# Altium PCB PCB1.PcbDoc (part 1 of 3)
Units mil, origin at the board's own origin, x right, y up, seen from the top; angles counter-clockwise.
Board outline 3937.01 x 3937.01 mil, 4 copper layers (L1, L2, L3, L4), stack 61.831 mil thick; 104 components, 183 nets, 709 pads, 345 vias.
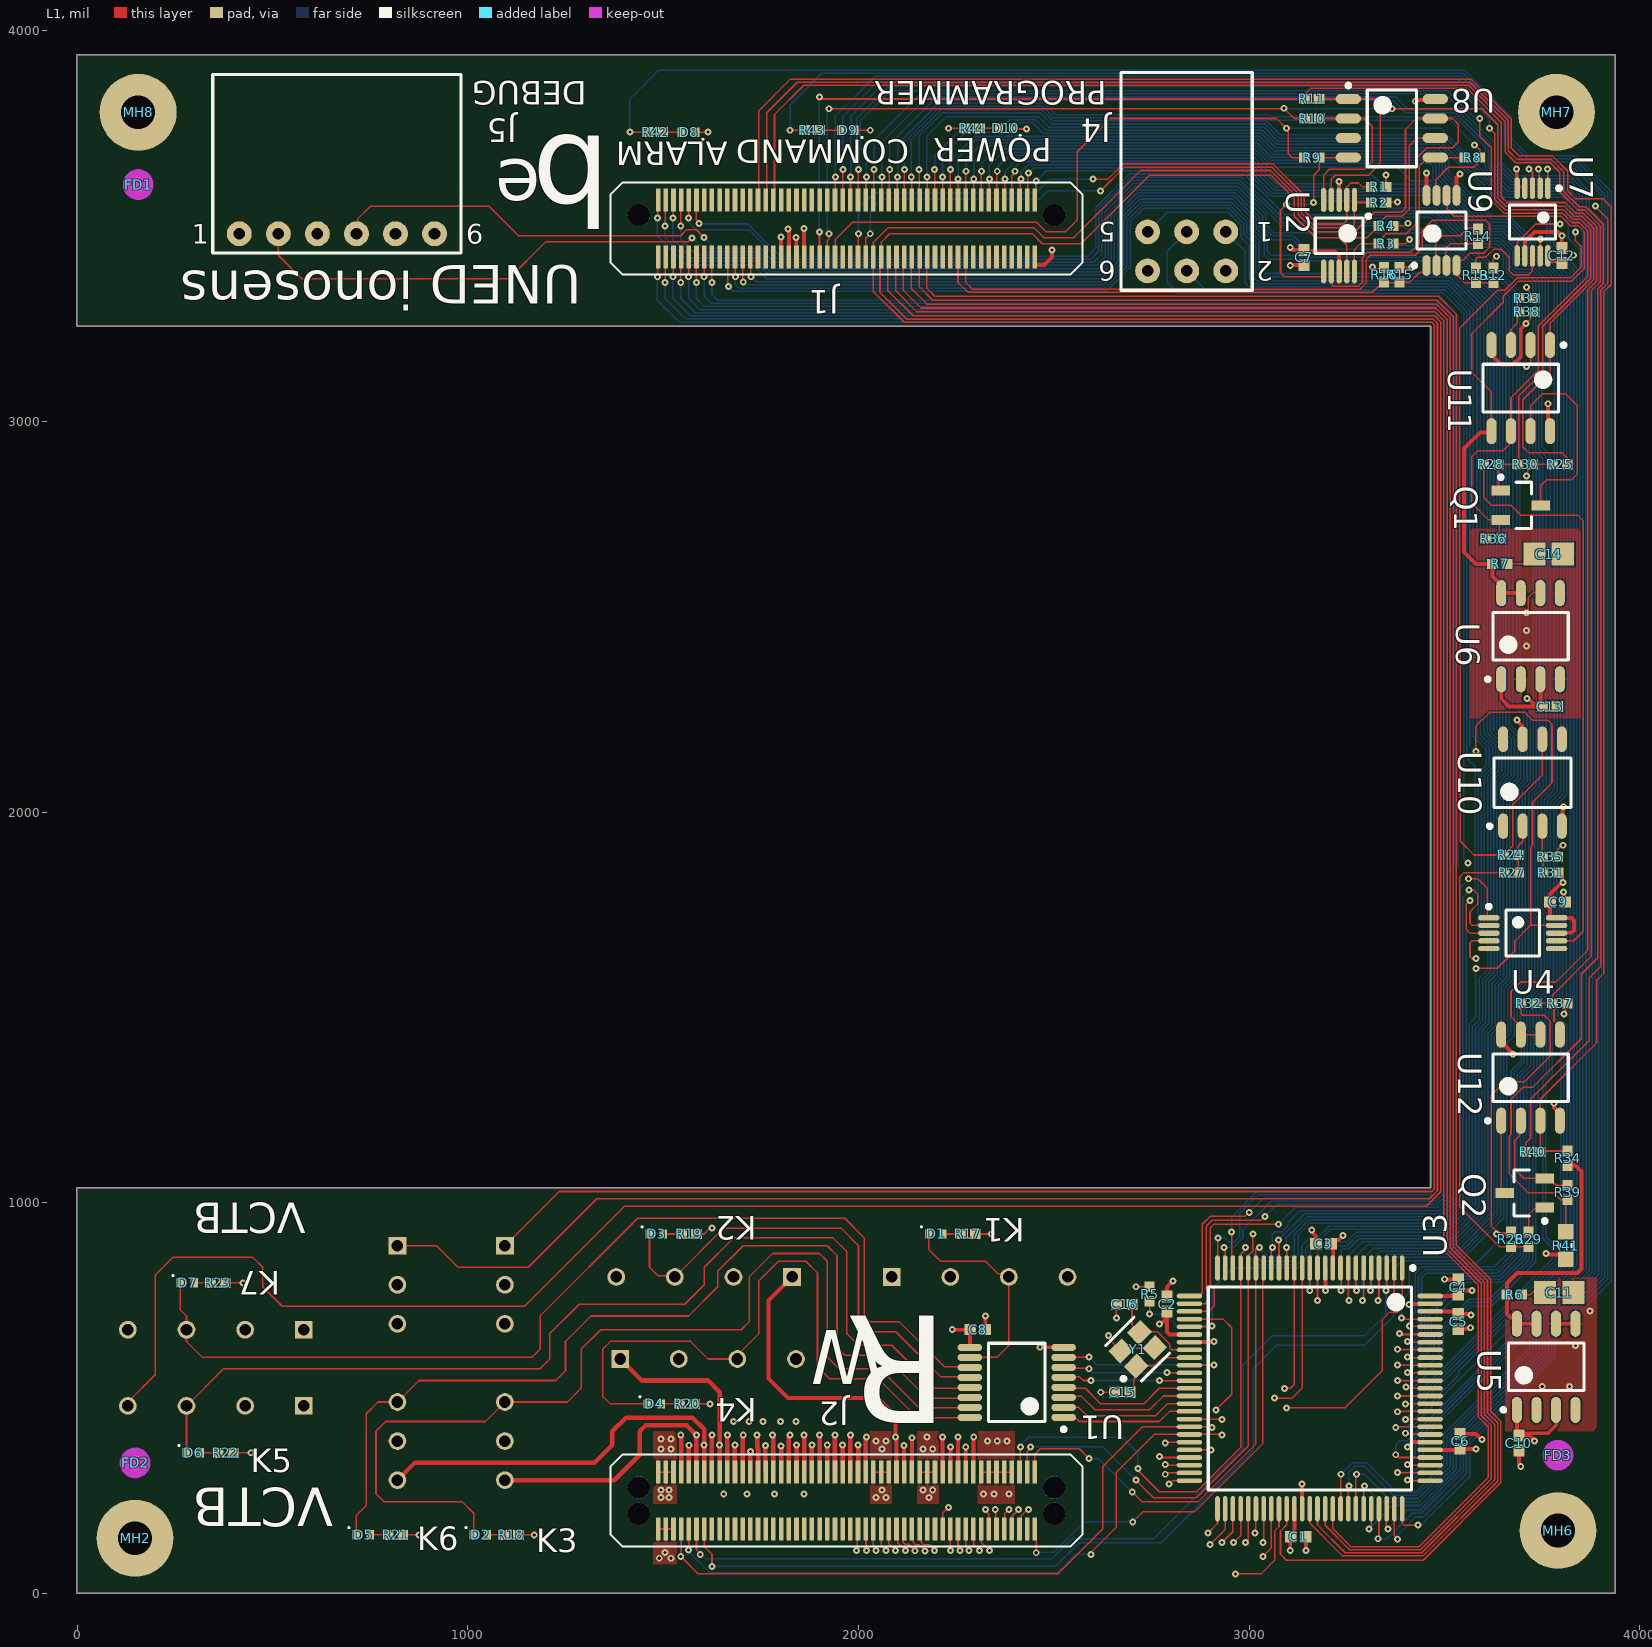
[diagram p0: L1 view]
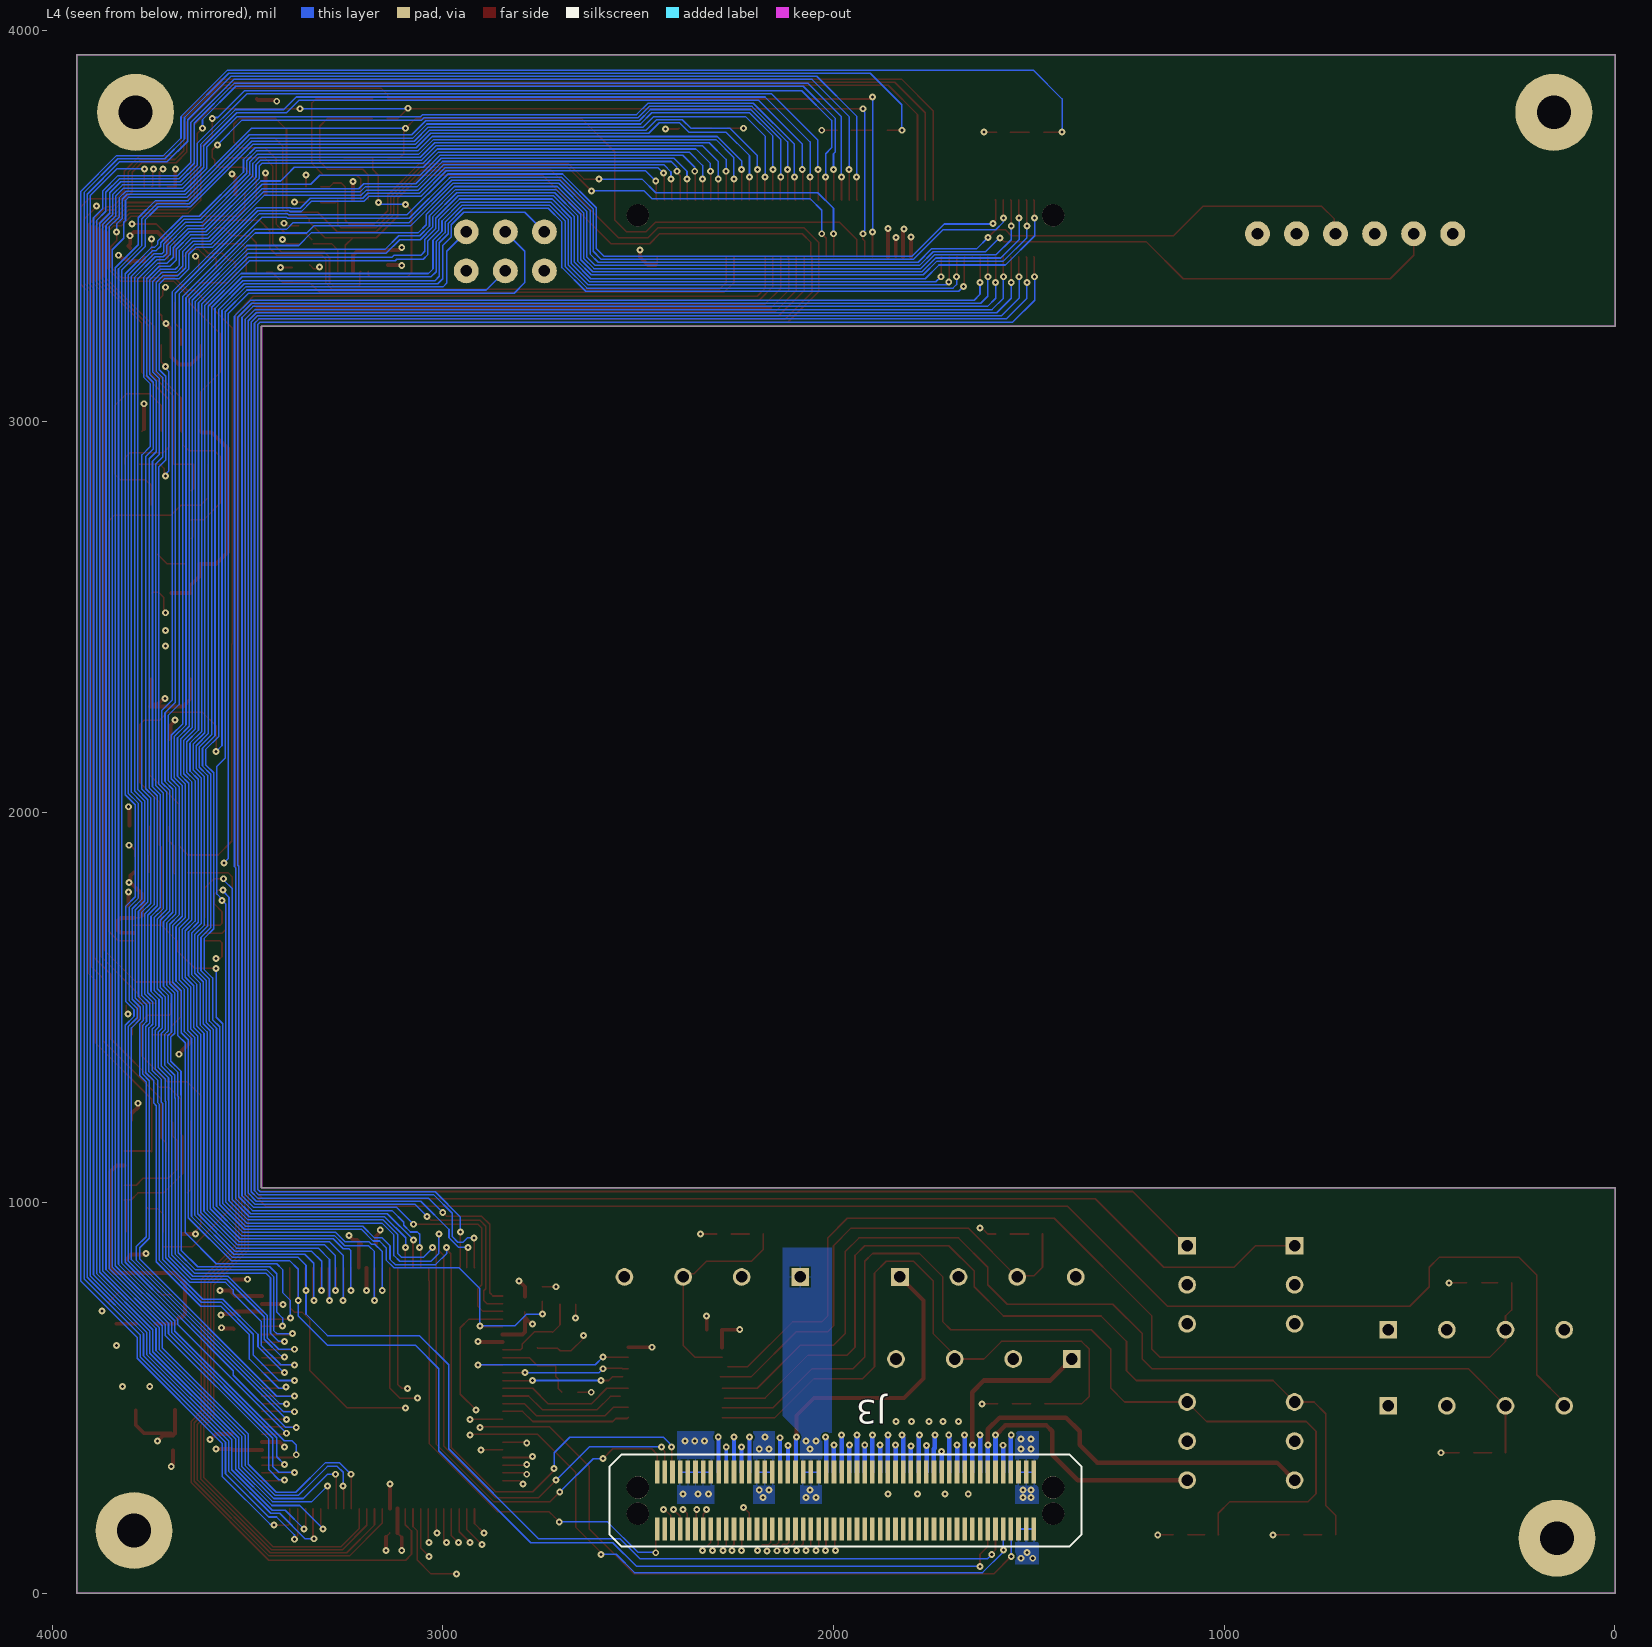
[diagram p1: L4 view, seen from below]
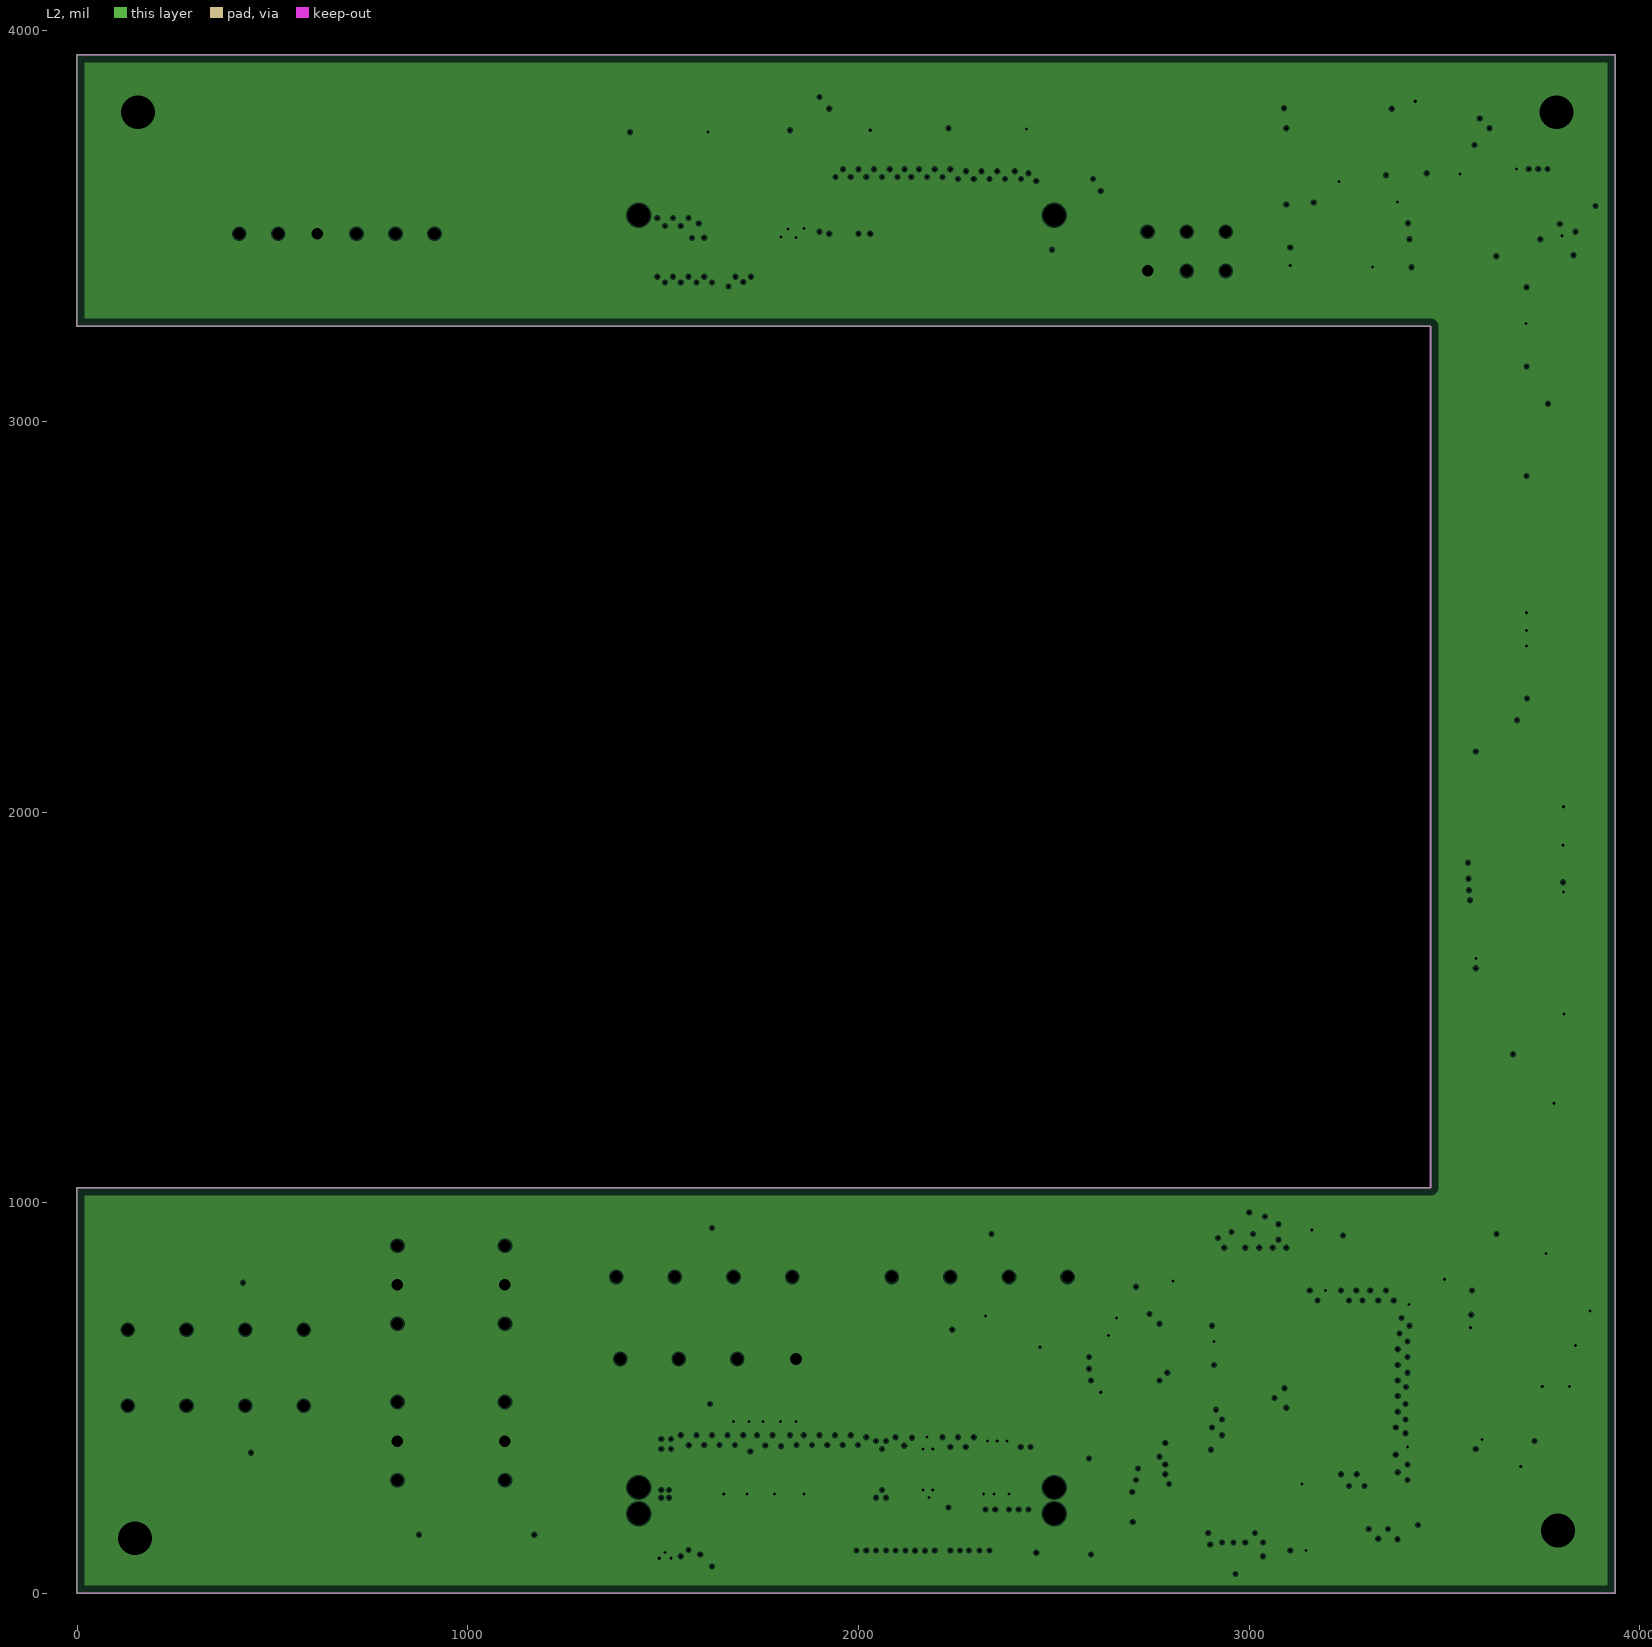
[diagram p2: L2, clearances drawn from the general rule]
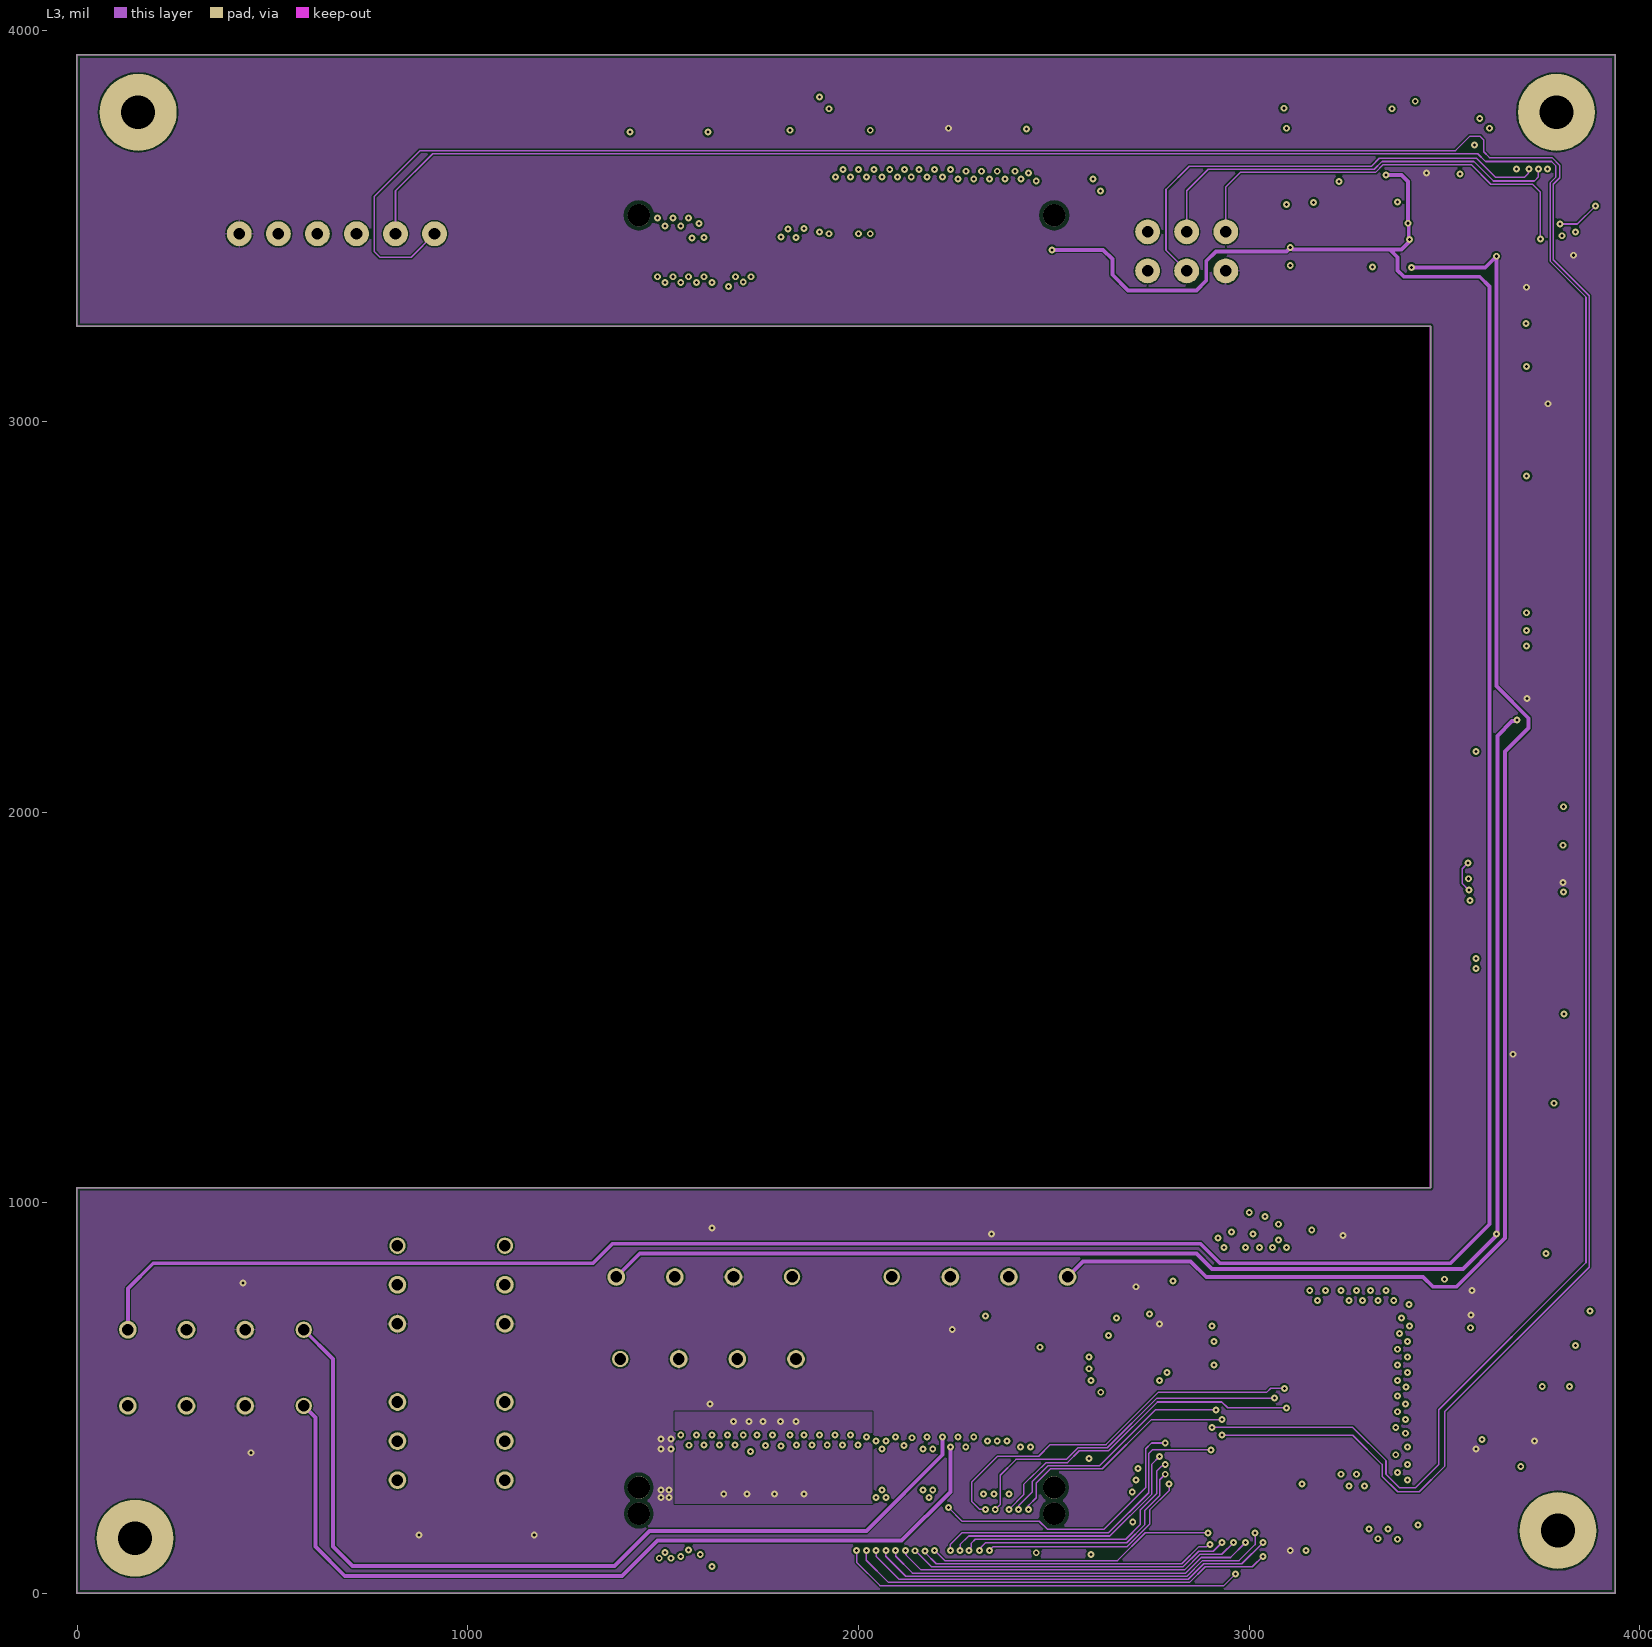
[diagram p3: L3]
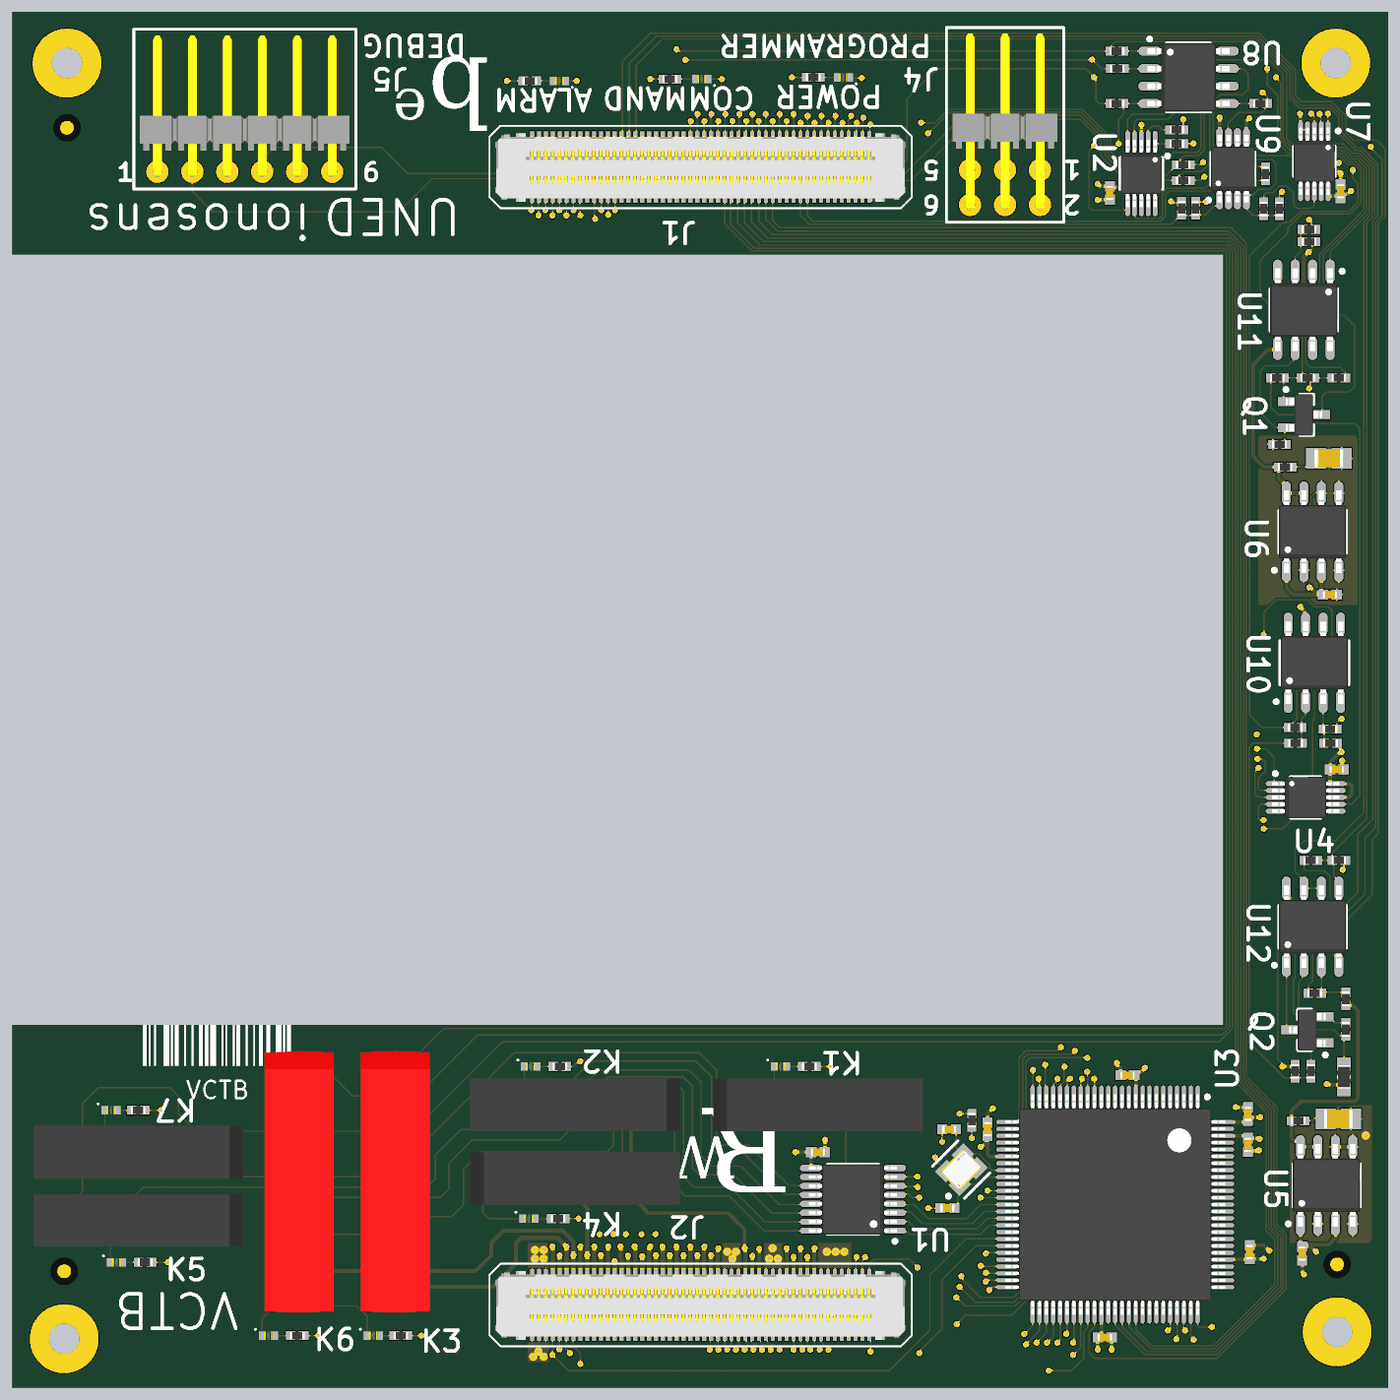
[diagram p6: 3D render of the assembled board from above, using the file's embedded part models]

## Layer stack, top to bottom
Top Mask: solder mask 0.5906, Solder Resist, Dk 3.8
L1: signal copper 1.378
Dielectric 1: prepreg 7.874, 7628, Dk 4.6
L2: plane copper 0.7087, net GND
Core: core 41.9291, FR-4, Dk 4.5
L3: signal copper 0.689
Dielectric 2: prepreg 7.874, 7628, Dk 4.6
L4: signal copper 1.378
Bottom Mask: solder mask 0.5906, Solder Resist, Dk 3.8

## Board outline
-0.53,0.82 -0.53,1038.62 3464.03,1038.62 3464.03,3243.34 -0.53,3243.34 -0.53,3937.83 3936.48,3937.83 3936.48,0.82

## Design rules (kind name [scope] priority, off if disabled: settings)
BoardOutlineClearance [All] p1: gap=7.87 ignorepadtopadclearanceinfootprint=FALSE
Clearance [All] p1: gap=4 ignorepadtopadclearanceinfootprint=FALSE except(5: Arc-Via Track-Via SMDPad-Via THPad-Via Via-Via Via-Fill Via-Poly Via-Region Via-Text; 9.84: Arc-Hole Track-Hole SMDPad-Hole THPad-Hole Via-Hole Fill-Hole Poly-Hole Region-Hole Text-Hole)
Clearance Clearance_keepout [OnLayer('Keep-Out Layer')] p2: gap=100 ignorepadtopadclearanceinfootprint=FALSE except(9.84: Arc-Hole Track-Hole SMDPad-Hole THPad-Hole Via-Hole Fill-Hole Poly-Hole Region-Hole Text-Hole; 25: Arc-THPad Track-THPad SMDPad-THPad THPad-THPad THPad-Via THPad-Fill THPad-Poly THPad-Region THPad-Text)
ComponentClearance [All] p1: gap=4 collisioncheckmode=3 verticalgap=4 showdistances=TRUE
DiffPairsRouting [All] p1: maxlimit=4 minlimit=4 mostfreqgap=4 toplayer_minwidth=4 toplayer_maxwidth=71497.94 toplayer_prefwidth=4 midlayer1_minwidth=4 midlayer1_maxwidth=71497.94 midlayer1_prefwidth=4 bottomlayer_minwidth=4 bottomlayer_maxwidth=71497.94 bottomlayer_prefwidth=4 maxuncoupledlength=500
Height [All] p1: minheight=0 maxheight=71497.94 prefheight=500
HoleSize [All] p1: absolutevalues=TRUE maxlimit=248.03 minlimit=7.87 maxpercent=80.000 minpercent=20.000
HoleToHoleClearance [All] p1: gap=9.84 allowstackedmicrovias=FALSE
MinimumAnnularRing [All] p1: minimumring=3
MinimumSolderMaskSliver [All] p1: minsoldermaskwidth=0
PlaneClearance [All] p1: clearance=4
PlaneConnect PlaneConnectPowerPads [InPadClass('PowerPads')] p1: planeconnectstyle=Direct reliefexpansion=20 reliefentries=4 reliefconductorwidth=10 reliefairgap=10
PlaneConnect [All] p2: pad.planeconnectstyle=Relief pad.reliefexpansion=11.81 pad.reliefentries=4 pad.reliefconductorwidth=4 pad.reliefairgap=4 via.planeconnectstyle=Direct via.reliefexpansion=11.81 via.reliefentries=4 via.reliefconductorwidth=5 via.reliefairgap=5
PolygonConnect PolygonConnectPowerPads [All vs (InPadClass('PowerPads'))] p1: connectstyle=Direct reliefconductorwidth=10 reliefentries=4 polygonreliefangle="90 Angle" airgapwidth=10
PolygonConnect [All] p2: thpad.connectstyle=Relief thpad.reliefconductorwidth=4 thpad.reliefentries=4 thpad.polygonreliefangle="90 Angle" thpad.airgapwidth=4 smdpad.connectstyle=Relief smdpad.reliefconductorwidth=4 smdpad.reliefentries=4 smdpad.polygonreliefangle="90 Angle" smdpad.airgapwidth=4 via.connectstyle=Direct via.reliefconductorwidth=5 via.reliefentries=4 via.polygonreliefangle="90 Angle" via.airgapwidth=5
RoutingVias [All] p1: holewidth=7.87 width=17.72 viastyle="Through Hole" minholewidth=7.87 minwidth=17.72 maxholewidth=248.03 maxwidth=257.87
SilkToSilkClearance [All] p1: silktosilkclearance=0
SilkToSolderMaskClearance [IsPad] p1: minsilkscreentomaskgap=4 clearancetoexposedcopper=TRUE
SolderMaskExpansion [All] p1: expansion=2.95 istentingtop=FALSE
Width Width_50ohm [InNetClass('Nodes')] p1: maxlimit=11.55 minlimit=10 preferedwidth=11.55 toplayer_minwidth=11.55 bottomlayer_minwidth=11.55 impedanceprofiledriven=TRUE impedanceprofileid={67C10FAE-C757-4667-B645-72E10606D8EE} impedanceprofilevalue=50.000000 minimp=50.000000 maximp=50.000000 favimp=50.000000
Width [All] p2: maxlimit=71497.94 minlimit=4 preferedwidth=4
20 further rules are at their usual default settings.

## Classes and differential pairs
net class Nodes: A B C D E F G H I J K L M N O P Q R S T U W X Y Z
component class Sheet3: FD1 FD2 FD3 J1 J2 J3 J4 J5 MH2 MH6 MH7 MH8
component class Sheet2: D1 D2 D3 D4 D5 D6 D7 K1 K2 K3 K4 K5 K6 K7 Q1 Q2 R12 R13 R14 R15 R16 R17 R18 R19 R20 R21 R22 R23 R24 R25 R26 R27 R28 R29 R30 R31 R32 R33 R34 R35 R36 R37 R38 R39 R40 R41 U9 U10 U11 U12
component class Sheet1: C1 C2 C3 C4 C5 C6 C7 C8 C9 C10 C11 C12 C13 C14 C15 C16 D8 D9 D10 R1 R2 R3 R4 R5 R6 R7 R8 R9 R10 R11 R42 R43 R44 U1 U2 U3 U4 U5 U6 U7 U8 Y1

## Components (designator, comment, footprint, x,y, rotation, side; value= is the part's Value field where it differs from the comment)
C1 "CC0402JRX7R7BB104" CAPC1005X06M#1 3125.71,145 r180 top value=100nF
C2 "CC0402JRX7R7BB104" CAPC1005X06M#1 2790,740.71 r270 top value=100nF
C3 "CC0402JRX7R7BB104" CAPC1005X06M#1 3190,895 r0 top value=100nF
C4 "CC0402JRX7R7BB104" CAPC1005X06M#1 3535,784.29 r270 top value=100nF
C5 "CC0402JRX7R7BB104" CAPC1005X06M#1 3535,695.71 r90 top value=100nF
C6 "CC0402JRX7R7BB104" CAPC1005X06M#1 3540,389.29 r270 top value=100nF
C7 "CC0402JRX7R7BB104" CAPC1005X06M#1 3140,3419.29 r90 top value=100nF
C8 "CC0402JRX7R7BB104" CAPC1005X06M#1 2305,675 r180 top value=100nF
C9 "CC0402JRX7R7BB104" CAPC1005X06M#1 3789.29,1770 r180 top value=100nF
C10 "CC0402JRX7R7BB104" CAPC1005X06M#1 3690,385 r90 top value=100nF
C11 "AC0805KKX7R8BB225" CAPC2012X14M 3793.58,770 r180 top value=2.2µF
C12 "CC0402JRX7R7BB104" CAPC1005X06M#1 3800,3424.29 r270 top value=100nF
C13 "CC0402JRX7R7BB104" CAPC1005X06M#1 3769.29,2270 r180 top value=100nF
C14 "AC0805KKX7R8BB225" CAPC2012X14M 3766.42,2660 r180 top value=2.2µF
C15 "CC0402JRNPO9BN200" CAPC1005X06M#2 2674.92,515 r0 top value=20pF
C16 "CC0402JRNPO9BN200" CAPC1005X06M#2 2679.92,740 r0 top value=20pF
D1 "SML-P13PTT86R" DIOC1005X02R 2197.62,920 r0 top
D2 "SML-P13PTT86R" DIOC1005X02R 1032.18,150 r0 top
D3 "SML-P13PTT86R" DIOC1005X02R 1482.62,920 r0 top
D4 "SML-P13PTT86R" DIOC1005X02R 1477.18,485 r0 top
D5 "SML-P13PTT86R" DIOC1005X02R 732.18,150 r0 top
D6 "SML-P13PTT86R" DIOC1005X02R 297.18,360 r0 top
D7 "SML-P13PTT86R" DIOC1005X02R 282.18,795 r0 top
D8 "SML-P12UTT86R" DIOC1005X02R 1565,3740 r180 top
D9 "SML-P12UTT86R" DIOC1005X02R 1972.38,3745 r180 top
D10 "SML-P12UTT86R" DIOC1005X02R 2377.38,3750 r180 top
FD1 "FID1X2R" FID1X2R 156.26,3605.79 r0 top
FD2 "FID1X2R" FID1X2R 148.39,334.13 r90 top
FD3 "FID1X2R" FID1X2R 3790.12,353.74 r90 top
J1 "LSHM-150-06.0-L-DV-A-N-K-TR" LSHM_150_06_0_L_DV_A_N_K_TR 1969.25,3493.58 r180 top
J2 "LSHM-150-06.0-L-DV-A-N-K-TR" LSHM_150_06_0_L_DV_A_N_K_TR 1969.25,237.68 r180 top
J3 "LSHM-150-06.0-L-DV-A-N-K-TR" LSHM_150_06_0_L_DV_A_N_K_TR 1969.25,237.68 r180 bottom
J4 "TSW-103-08-F-D-RA" TSW-103-08-F-D-RA 2840,3595 r180 top
J5 "HTSW-106-08-F-S-RA" TSW-106-08-F-S-RA 665,3590 r0 top
K1 "3570.1419.051" 3570.1419 2310,810 r0 top
K2 "3570.1419.051" 3570.1419 1605,810 r180 top
K3 "9002-05-00" "SIP564W40P254L1980H810Q6 - Cloned" 1095,590 r270 top
K4 "3570.1419.051" 3570.1419 1615,600 r0 top
K5 "3570.1419.051" 3570.1419 355,480 r180 top
K6 "9002-05-00" "SIP564W40P254L1980H810Q6 - Cloned" 820,590 r270 top
K7 "3570.1419.051" 3570.1419 355,675 r180 top
MH2 "C500h220" C500h220z368#1 155,160 r0 top
MH6 "C500h220" C500h220z368#2 3750,185 r0 top
MH7 "C500h220" C500h220z368#3 3750,3690 r0 top
MH8 "C500h220" C500h220z368#4 125,3700 r0 top
Q1 "MMBFJ202" SOT95P237X111-3M 3695,2785 r0 top
Q2 "MMBFJ202" SOT95P237X111-3M 3705,1025 r180 top
R1 "AC0402FR-074K7L" RESC1005X04M 3331.3,3600 r0 top value=4.7k
R2 "AC0402FR-074K7L" RESC1005X04M 3331.3,3560 r0 top value=4.7k
R3 "AC0402FR-074K7L" RESC1005X04M 3350,3455 r0 top value=4.7k
R4 "AC0402FR-074K7L" RESC1005X04M 3350,3500 r0 top value=4.7k
R5 "AC0402FR-0710KL" RESC1005X04M 2745,766.3 r90 top value=10k
R6 "AC0402FR-071KL" RESC1005X04M 3678.7,765 r180 top value=1k
R7 "AC0402FR-071KL" RESC1005X04M 3641.3,2635 r180 top value=1k
R8 "AC0402FR-072KL" RESC1005X04M 3571.3,3675 r0 top value=2k
R9 "AC0402FR-072KL" RESC1005X04M 3160,3675 r180 top value=2k
R10 "AC0402FR-072KL" RESC1005X04M 3161.3,3775 r180 top value=2k
R11 "AC0402FR-072KL" RESC1005X04M 3160,3825 r0 top value=2k
R12 "AC0402FR-07100KL" RESC1005X04M 3625,3373.7 r90 top value=100k
R13 "AC0402FR-0775KL" RESC1005X04M 3580,3373.7 r270 top value=75k
R14 "AC0402FR-0725K5L" RESC1005X04M 3585,3473.7 r270 top value=25.5k
R15 "AC0402FR-07100KL" RESC1005X04M 3385,3375 r90 top value=100k
R16 "AC0402FR-07100KL" RESC1005X04M 3345,3375 r270 top value=100k
R17 "AC0402FR-07240RL" RESC1005X04M 2280,920 r180 top value=240
R18 "AC0402FR-07240RL" RESC1005X04M 1111.3,150 r180 top value=240
R19 "AC0402FR-07240RL" RESC1005X04M 1566.3,920 r180 top value=240
R20 "AC0402FR-07240RL" RESC1005X04M 1561.3,485 r180 top value=240
R21 "AC0402FR-07240RL" RESC1005X04M 815,150 r180 top value=240
R22 "AC0402FR-07240RL" RESC1005X04M 380,360 r180 top value=240
R23 "AC0402FR-07240RL" RESC1005X04M 360,795 r180 top value=240
R24 "AC0402FR-07348KL" RESC1005X04M 3670,1890 r180 top value=348k
R25 "AC0402FR-07348KL" RESC1005X04M 3795,2890 r0 top value=348k
R26 "AC0402FR-07165RL" RESC1005X04M 3670,906.3 r90 top value=165
R27 "AC0402FR-07348KL" RESC1005X04M 3671.3,1845 r0 top value=348k
R28 "AC0402FR-071K5L" RESC1005X04M 3618.7,2890 r180 top value=1.5k
R29 "AC0402FR-07412RL" RESC1005X04M 3715,906.3 r270 top value=412
R30 "AC0402FR-07348KL" RESC1005X04M 3706.3,2890 r0 top value=348k
R31 "AC0402FR-07348KL" RESC1005X04M 3771.3,1845 r180 top value=348k
R32 "AC0402FR-07536KL" RESC1005X04M 3715,1510 r180 top value=536k
R33 "AC0402FR-07348KL" RESC1005X04M 3710,3315 r180 top value=348k
R34 "AC0402FR-076K2L" RESC1005X04M 3815,1113.7 r270 top value=6.2k
R35 "AC0402FR-07348KL" RESC1005X04M 3770,1885 r180 top value=348k
R36 "AC0402FR-072KL" RESC1005X04M 3625,2700 r0 top value=2k
R37 "AC0402FR-0782KL" RESC1005X04M 3795,1510 r180 top value=82k
R38 "AC0402FR-07348KL" RESC1005X04M 3710,3280 r180 top value=348k
R39 "AC0402FR-07150RL" RESC1005X04M 3815,1026.3 r90 top value=150
R40 "AC0402FR-071K91L" RESC1005X04M 3726.3,1130 r0 top value=1.91k
R41 "AC0603FR-070RL" RESC1608X06M 3810,890.43 r90 top value=0
R42 "AC0402FR-07240RL" RESC1005X04M 1480,3740 r0 top value=240
R43 "AC0402FR-07240RL" RESC1005X04M 1881.3,3745 r0 top value=240
R44 "AC0402FR-07240RL" RESC1005X04M 2291.3,3750 r0 top value=240
U1 "ULN2003AIPWR" TSOP65P640X120-16M 2405,540 r180 top
U2 "ADS1115BQDGSRQ1" TSSOP50P490X110-10M 3230,3475 r270 top
U3 "ATMEGA2560-16AU" ATML-100A_M 3155,525 r270 top
U4 "MCP4252-502E/UN" TSSOP50P490X110-10N 3700,1690 r0 top
U5 "MCP1501-33E/SN" SOIC127P600X175-8M#1 3760,580 r90 top
U6 "MCP1501-10E/SN" SOIC127P600X175-8M#1 3720,2450 r90 top
U7 "MCP4252-503E/UN" TSSOP50P490X110-10N 3725,3510 r270 top
U8 "SRDA3.3-6.TBT" SOIC127P600X175-8M#2 3365,3750 r0 top
U9 "AD8221ARMZ-RL" TSOP65P490X110-8N 3492.2,3488.5 r90 top
U10 "TL081ACD" SOIC127P600X175-8M#2 3725,2075 r90 top
U11 "MCP6402T-H/SN" SOIC127P600X175-8M#1 3695,3085 r270 top
U12 "MCP6402T-H/SN" SOIC127P600X175-8M#1 3720,1320 r90 top
Y1 "Q24FA20H0024700" FA-20H 2715,625 r45 top

## Footprints (in the part's own frame and the unit in brackets; to place one, negate y for a bottom-side part, rotate by r counter-clockwise, add the part's x,y. Pads: shape width x height; smd on the part's side, far side on the other; paste and mask are expansions set on the pad)
3570.1419 [mil] "Grade Mini SIP - 1 Form A"
  rect 45.28x45.28 / inner round 41.83 / far side rect 45.28x45.28 hole 29.53: 1(-225,0)
  round 45.28 hole 29.53: 2(-75,0) 3(75,0) 4(225,0)
  body extent -305,-75 295,75, height 255
ATML-100A_M [mm] "TQFP, 100-Leads, Body 14x14mm, Pitch 0.5mm, IPC Low Density"
  oval 1.65x0.3 smd: 1(-7.825,6) 2(-7.825,5.5) 3(-7.825,5) 4(-7.825,4.5) 5(-7.825,4) 6(-7.825,3.5) 7(-7.825,3) 8(-7.825,2.5) 9(-7.825,2) 10(-7.825,1.5) 11(-7.825,1) 12(-7.825,0.5) 13(-7.825,0) 14(-7.825,-0.5) 15(-7.825,-1) 16(-7.825,-1.5) 17(-7.825,-2) 18(-7.825,-2.5) 19(-7.825,-3) 20(-7.825,-3.5) 21(-7.825,-4) 22(-7.825,-4.5) 23(-7.825,-5) 24(-7.825,-5.5) 25(-7.825,-6) 51(7.825,-6) 52(7.825,-5.5) 53(7.825,-5) 54(7.825,-4.5) 55(7.825,-4) 56(7.825,-3.5) 57(7.825,-3) 58(7.825,-2.5) 59(7.825,-2) 60(7.825,-1.5) 61(7.825,-1) 62(7.825,-0.5) 63(7.825,0) 64(7.825,0.5) 65(7.825,1) 66(7.825,1.5) 67(7.825,2) 68(7.825,2.5) 69(7.825,3) 70(7.825,3.5) 71(7.825,4) 72(7.825,4.5) 73(7.825,5) 74(7.825,5.5) 75(7.825,6)
  oval 0.3x1.65 smd: 26(-6,-7.825) 27(-5.5,-7.825) 28(-5,-7.825) 29(-4.5,-7.825) 30(-4,-7.825) 31(-3.5,-7.825) 32(-3,-7.825) 33(-2.5,-7.825) 34(-2,-7.825) 35(-1.5,-7.825) 36(-1,-7.825) 37(-0.5,-7.825) 38(0,-7.825) 39(0.5,-7.825) 40(1,-7.825) 41(1.5,-7.825) 42(2,-7.825) 43(2.5,-7.825) 44(3,-7.825) 45(3.5,-7.825) 46(4,-7.825) 47(4.5,-7.825) 48(5,-7.825) 49(5.5,-7.825) 50(6,-7.825) 76(6,7.825) 77(5.5,7.825) 78(5,7.825) 79(4.5,7.825) 80(4,7.825) 81(3.5,7.825) 82(3,7.825) 83(2.5,7.825) 84(2,7.825) 85(1.5,7.825) 86(1,7.825) 87(0.5,7.825) 88(0,7.825) 89(-0.5,7.825) 90(-1,7.825) 91(-1.5,7.825) 92(-2,7.825) 93(-2.5,7.825) 94(-3,7.825) 95(-3.5,7.825) 96(-4,7.825) 97(-4.5,7.825) 98(-5,7.825) 99(-5.5,7.825) 100(-6,7.825)
  silkscreen extent -7.95,-6.6 6.6,6.83, body extent -8,-8 8,8, height 1.2
C500h220z368#1 [mm] "C500h220z368 hole"
  round 5 hole 2.2: 1(-0.168,-0.477)
C500h220z368#2 [mm] "C500h220z368 hole"
  round 5 hole 2.2: 1(1.019,-0.612)
C500h220z368#3 [mm] "C500h220z368 hole"
  round 5 hole 2.2: 1(0.919,2.561)
C500h220z368#4 [mm] "C500h220z368 hole"
  round 5 hole 2.2: 1(0.794,2.307)
CAPC1005X06M#1 [mm] "Chip Capacitor, 2-Leads, Body 1,00x0,50mm, IPC Low Density"
  rect 0.76x0.72 smd: 1(-0.49,0) 2(0.49,0)
  body extent -0.53,-0.28 0.53,0.28, height 0.55
CAPC1005X06M#2 [mm] "Chip Capacitor, 2-Leads, Body 1,00x0,50mm, IPC Low Density"
  rect 0.72x0.72 smd: 1(-0.51,0) 2(0.51,0)
  body extent -0.53,-0.28 0.53,0.28, height 0.55
CAPC2012X14M [mm] "Chip Capacitor, 2-Leads, Body 2,00x1,25mm, IPC Low Density"
  rect 1.45x1.5 smd: 1(-0.925,0) 2(0.925,0)
  body extent -1.05,-0.67 1.05,0.67, height 1.35
DIOC1005X02R [mm] "Chip Diode, 2-Leads, Body 1,00x0,50mm, Manufacturer Recommended"
  rect 0.5x0.6 smd paste+0 mask+0: 1(-0.447,0) 2(0.453,0)
  silkscreen extent -0.98,0.42 -0.88,0.52, body extent -0.8,-0.43 0.8,0.43, height 0.25
FA-20H [mm] "SEIKO EPSON CRYSTAL"
  rect 1.2x1.1 smd paste+0 mask+0: 1(-0.85,-0.7) 2(0.85,-0.7) 3(0.85,0.7) 4(-0.85,0.7)
  silkscreen extent -2.15,-1.63 1.3,1.65, body extent -1.55,-1.35 1.55,1.35, height 0.25
FID1X2R [mm] "Fiducial - Round 1x2mm"
  round 1 smd paste-0.5 mask+0.5: 0(0,0)
  L1 keep-out circle w1: c0,0 r0.5
  L1 keep-out region: 0,0
LSHM_150_06_0_L_DV_A_N_K_TR [mm] "LSHM_150_06_0_L_DV_A_N_K_TR Without Shield"
  rect 0.3x1.5 smd: 1(12.25,-1.85) 2(12.25,1.85) 3(11.75,-1.85) 4(11.75,1.85) 5(11.25,-1.85) 6(11.25,1.85) 7(10.75,-1.85) 8(10.75,1.85) 9(10.25,-1.85) 10(10.25,1.85) 11(9.75,-1.85) 12(9.75,1.85) 13(9.25,-1.85) 14(9.25,1.85) 15(8.75,-1.85) 16(8.75,1.85) 17(8.25,-1.85) 18(8.25,1.85) 19(7.75,-1.85) 20(7.75,1.85) 21(7.25,-1.85) 22(7.25,1.85) 23(6.75,-1.85) 24(6.75,1.85) 25(6.25,-1.85) 26(6.25,1.85) 27(5.75,-1.85) 28(5.75,1.85) 29(5.25,-1.85) 30(5.25,1.85) 31(4.75,-1.85) 32(4.75,1.85) 33(4.25,-1.85) 34(4.25,1.85) 35(3.75,-1.85) 36(3.75,1.85) 37(3.25,-1.85) 38(3.25,1.85) 39(2.75,-1.85) 40(2.75,1.85) 41(2.25,-1.85) 42(2.25,1.85) 43(1.75,-1.85) 44(1.75,1.85) 45(1.25,-1.85) 46(1.25,1.85) 47(0.75,-1.85) 48(0.75,1.85) 49(0.25,-1.85) 50(0.25,1.85) 51(-0.25,-1.85) 52(-0.25,1.85) 53(-0.75,-1.85) 54(-0.75,1.85) 55(-1.25,-1.85) 56(-1.25,1.85) 57(-1.75,-1.85) 58(-1.75,1.85) 59(-2.25,-1.85) 60(-2.25,1.85) 61(-2.75,-1.85) 62(-2.75,1.85) 63(-3.25,-1.85) 64(-3.25,1.85) 65(-3.75,-1.85) 66(-3.75,1.85) 67(-4.25,-1.85) 68(-4.25,1.85) 69(-4.75,-1.85) 70(-4.75,1.85) 71(-5.25,-1.85) 72(-5.25,1.85) 73(-5.75,-1.85) 74(-5.75,1.85) 75(-6.25,-1.85) 76(-6.25,1.85) 77(-6.75,-1.85) 78(-6.75,1.85) 79(-7.25,-1.85) 80(-7.25,1.85) 81(-7.75,-1.85) 82(-7.75,1.85) 83(-8.25,-1.85) 84(-8.25,1.85) 85(-8.75,-1.85) 86(-8.75,1.85) 87(-9.25,-1.85) 88(-9.25,1.85) 89(-9.75,-1.85) 90(-9.75,1.85) 91(-10.25,-1.85) 92(-10.25,1.85) 93(-10.75,-1.85) 94(-10.75,1.85) 95(-11.25,-1.85) 96(-11.25,1.85) 97(-11.75,-1.85) 98(-11.75,1.85) 99(-12.25,-1.85) 100(-12.25,1.85)
  round 1.45 hole 1.45 unplated: ""(-13.5,-0.85) ""(13.5,-0.85)
  silkscreen extent -15.35,-3 15.35,3, body extent -14.88,-2.46 14.92,2.52, height 7.3
RESC1005X04M [mm] "Chip Resistor, 2-Leads, Body 1,00x0,50mm, IPC Low Density"
  rect 0.7x0.65 smd: 1(-0.475,0) 2(0.475,0)
  body extent -0.53,-0.28 0.53,0.28, height 0.37
RESC1608X06M [mm] "Chip Resistor, 2-Leads, Body 1,60x0,80mm, IPC Low Density"
  rect 1x1 smd: 1(-0.9,0) 2(0.9,0)
  silkscreen extent -0.1,-0.4 0.1,0.4, body extent -0.85,-0.45 0.85,0.45, height 0.55
"SIP564W40P254L1980H810Q6 - Cloned" [mil] "SIP, 2.54 mm pitch; 7 pin, 19.80 mm L X 5.64 mm W X 8.10 mm H body"
  rect 45.28x45.28 / inner round 41.83 / far side rect 45.28x45.28 hole 29.53: 1(-300,0)
  round 45.28 hole 29.53: 2(-100,0) 3(100,0) 4(300,0) 5(-200,0) 6(200,0)
  body extent -374,-99 374,99, height 300
SOIC127P600X175-8M#1 [mm] "SOIC, 8-Leads, Body 4,90x3,90mm, Pitch 1,27mm, IPC Low Density"
  oval 1.7x0.65 smd: 1(-2.8,1.905) 2(-2.8,0.635) 3(-2.8,-0.635) 4(-2.8,-1.905) 5(2.8,-1.905) 6(2.8,-0.635) 7(2.8,0.635) 8(2.8,1.905)
  silkscreen extent -2.92,-2.45 1.55,2.9, body extent -3,-2.45 3,2.45, height 1.75
SOIC127P600X175-8M#2 [mm] "SOIC, 8-Leads, Body 4,90x3,90mm, Pitch 1,27mm, IPC Low Density"
  oval 1.65x0.65 smd: 1(-2.825,1.905) 2(-2.825,0.635) 3(-2.825,-0.635) 4(-2.825,-1.905) 5(2.825,-1.905) 6(2.825,-0.635) 7(2.825,0.635) 8(2.825,1.905)
  silkscreen extent -2.95,-2.5 1.6,2.9, body extent -3,-2.5 3,2.5, height 1.75
SOT95P237X111-3M [mm] "SOT23, 3-Leads, Body 2,92x2,37mm, Pitch 0,95mm, IPC Low Density"
  rect 1.2x0.65 smd: 1(-1.3,0.95) 2(-1.3,-0.95) 3(1.3,0)
  silkscreen extent -1.42,-1.5 0.7,1.95, body extent -1.32,-1.52 1.32,1.52, height 1.11
TSOP65P490X110-8N [mm] "TSOP, 8-Leads, Body 3,00x3,00mm, Pitch 0,65mm, IPC Medium Density"
  oval 1.35x0.5 smd: 1(-2.275,0.975) 2(-2.275,0.325) 3(-2.275,-0.325) 4(-2.275,-0.975) 5(2.275,-0.975) 6(2.275,-0.325) 7(2.275,0.325) 8(2.275,0.975)
  silkscreen extent -2.4,-1.6 1.2,1.9, body extent -2.45,-1.6 2.45,1.6, height 1.1
TSOP65P640X120-16M [mm] "TSOP, 16-Leads, Body 5,00x4,40mm, Pitch 0,65mm, IPC Low Density"
  oval 1.6x0.45 smd: 1(-3.05,2.275) 2(-3.05,1.625) 3(-3.05,0.975) 4(-3.05,0.325) 5(-3.05,-0.325) 6(-3.05,-0.975) 7(-3.05,-1.625) 8(-3.05,-2.275) 9(3.05,-2.275) 10(3.05,-1.625) 11(3.05,-0.975) 12(3.05,-0.325) 13(3.05,0.325) 14(3.05,0.975) 15(3.05,1.625) 16(3.05,2.275)
  silkscreen extent -3.18,-2.55 1.85,3.17, body extent -3.2,-2.55 3.2,2.55, height 1.2
TSSOP50P490X110-10M [mm] "TSSOP, 10-Leads, Body 3,00x3,00mm, Pitch 0,50mm, IPC Low Density"
  oval 1.55x0.35 smd: 1(-2.325,1) 2(-2.325,0.5) 3(-2.325,0) 4(-2.325,-0.5) 5(-2.325,-1) 6(2.325,-1) 7(2.325,-0.5) 8(2.325,0) 9(2.325,0.5) 10(2.325,1)
  silkscreen extent -1.39,-1.55 1.15,2.03, body extent -2.45,-1.5 2.45,1.5, height 1.1
TSSOP50P490X110-10N [mm] "TSSOP, 10-Leads, Body 3,00x3,00mm, Pitch 0,50mm, IPC Medium Density"
  oval 1.4x0.35 smd: 1(-2.2,1) 2(-2.2,0.5) 3(-2.2,0) 4(-2.2,-0.5) 5(-2.2,-1) 6(2.2,-1) 7(2.2,-0.5) 8(2.2,0) 9(2.2,0.5) 10(2.2,1)
  silkscreen extent -2.32,-1.5 1.1,1.85, body extent -2.45,-1.5 2.45,1.5, height 1.1
TSW-103-08-F-D-RA [mil] "6 Pin Header Vertical, right-angle"
  round 63.78 hole 30: 1(-100,110) 2(-100,210) 3(0,110) 4(0,210) 5(100,110) 6(100,210)
  silkscreen extent -168,-298 168,260, body extent -150,-281 150,221, height 218
TSW-106-08-F-S-RA [mil] "6 Pin Header, right-angle, 1 row"
  round 63.78 hole 30: 1(-250,-110) 2(-150,-110) 3(-50,-110) 4(50,-110) 5(150,-110) 6(250,-110)
  silkscreen extent -318,-160 318,298, body extent -300,-122 300,280, height 121

## Part data
C1 C2 C3 C4 C5 C6 C7 C8 C9 C10 C12 C13: library part C01-0402-01-00001-1, "Cap Ceramic 100nF 50V X7R 5% SMD 0402 125°C", Capacitor Type=Ceramic, Case/Package=0402, Dielectric=X7R, Manufacturer=YAGEO, Max Operating Temperature=125°C, Min Operating Temperature=-55°C, Tolerance=5%, Voltage Rating=16V, Composition=Ceramic, Depth=500µm, Length=1mm, Manufacturer P/N=CC0402JRX7R7BB104, Mount="Surface Mount", Mounting Technology="Surface Mount", Pins=2, RoHS Compliant=Yes, Termination=SMD/SMT, Thickness=558.8µm, Voltage Rating (DC)=16V, Width=508µm
C11 C14: library part C01-0402-01-00007-1, "Cap Ceramic 2.2uF 25V X7R +-10% SMD 0805 125°C", Capacitor Type=Ceramic, Case/Package=0805, Dielectric=XR7, Manufacturer=YAGEO, Max Operating Temperature=125°C, Min Operating Temperature=-55°C, Tolerance=10%, Voltage Rating=25V, Composition=Ceramic, Depth=1.25mm, Length=2mm, Manufacturer P/N=AC0805KKX7R8BB225, Mount="Surface Mount", Mounting Technology="Surface Mount", Pins=2, RoHS Compliant=Yes, Termination=SMD/SMT, Thickness=711.2µm, Voltage Rating (DC)=25V, Width=1.2466mm
C15 C16: library part C01-0402-01-00008-1, "Cap Ceramic 20pF 50V C0G 5% SMD 0402 125°C", Capacitor Type=Ceramic, Case/Package=0402, Dielectric=COG, Manufacturer=YAGEO, Max Operating Temperature=125°C, Min Operating Temperature=-55°C, Tolerance=5%, Voltage Rating=50V, Composition=Ceramic, Depth=500µm, Length=990.6µm, Manufacturer P/N=CC0402JRNPO9BN200, Mount="Surface Mount", Mounting Technology="Surface Mount", Pins=2, RoHS Compliant=Yes, Termination=SMD/SMT, Thickness=558.8µm, Voltage Rating (DC)=50V, Width=508µm
D1 D2 D3 D4 D5 D6 D7: library part D01-0402-01-00000-1, "Led green 0402", Case/Package=0402, Colour=Green, Forward Current="20 mA", Forward Voltage=2.1V, Manufacturer=ROHM, Max Operating Temperature=85°C, Max Power Dissipation=52mW, Min Operating Temperature=-40°C, Dominant Wavelength="560 nm", Lens Style="Rectangular, Square", Luminous Intensity="10 mcd", Manufacturer P/N=SML-P13PTT86R, Mounting Technology=SMD, Number of LEDs=1, Pins=2, RoHS Compliant=Yes
D8 D9 D10: library part D01-0402-01-00001-1, "Led red 0402", Case/Package=0402, Colour=red, Forward Current="20 mA", Forward Voltage=2V, Manufacturer=ROHM, Max Operating Temperature=85°C, Max Power Dissipation=52mW, Min Operating Temperature=-40°C, Dominant Wavelength="620 nm", Lens Style="Rectangular, Square", Luminous Intensity="85 mcd", Manufacturer P/N=SML-P12UTT86R, Mounting Technology=SMD, Number of LEDs=1, Pins=2, RoHS Compliant=Yes
FD1 FD2 FD3: library part CMP-00028-00005-2, "Fiducial - Round 1x2mm", Pins=0
J1 J2 J3: library part J01-001-01-00001-2, "Conn Socket and Terminal Strip HDR/SKT 100 POS 0.5mm Solder ST SMD T/R", Case/Package=SMD, Housing Color=Black, Manufacturer=Samtec, Max Operating Temperature=125°C, Min Operating Temperature=-55°C, Contact Material=Bronze, Contact Plating=Gold, Depth="4.98 mm", Gender=HERMAPHRODITIC, Housing Material=Polymer, Length="29.7 mm", Manufacturer P/N=LSHM-150-06.0-L-DV-A-N-K-TR, Mounting Technology=SMD, Number of Rows=2, Orientation=Straight, Pins=100, Pitch="500 µm", RoHS Compliant=Yes, Termination=Solder
J4: library part J01-001-01-00003-2, "6 Vias Pin Header 2.54mm, Right Angle", Case/Package="Through Hole", Housing Color=Black, Manufacturer=Samtec, Max Operating Temperature=125°C, Min Operating Temperature=-55°C, Contact Material=Bronze, Contact Plating=Gold, Depth="4.87 mm", Gender=Male, Housing Material=Polyester, Length="7.62 mm", Manufacturer P/N=TSW-103-08-F-D-RA, Mounting Technology="Through Hole", Number of Rows=2, Orientation=Straight, Pins=6, Pitch=2.54mm, RoHS Compliant=Yes, Termination=Solder
J5: library part J01-001-01-00005-2, "6 Vias Pin Header 2.54mm, Right Angle, 1 Row", Case/Package="Through Hole", Housing Color=Black, Manufacturer=Samtec, Max Operating Temperature=125°C, Min Operating Temperature=-55°C, Contact Material=Bronze, Contact Plating=Gold, Depth="4.87 mm", Gender=Male, Housing Material=Polyester, Length="7.62 mm", Manufacturer P/N=HTSW-106-08-F-S-RA, Mounting Technology="Through Hole", Number of Rows=2, Orientation=Straight, Pins=6, Pitch=2.54mm, RoHS Compliant=Yes, Termination=Solder
K1 K2 K4 K5 K7: library part K01-0008-01-00008-1, "Reed Relay, Mini SIP, 5 VDC; 1 Form A, 15W, 200 VDC, 1.25A", Case/Package=SIP, Coil Current=10mA, Coil Voltage (DC)=5V, Contact Current Rating=1A, Contact Resistence=0.15, Insulation Resistance=0, Manufacturer=Comus, Max Operating Temperature=85°C, Min Operating Temperature=-40°C, Switching Voltage=200V, Coil resitence=500, Coil Type=-, Contact Form=1A, Contact Material=-, Height=6.98mm, Manufacturer P/N=3570.1419.051, Mounting Technology=TH, Number of Terminal=4, Operate Time=350µs, Packaging=SIP, Pins=4, Relay Type=Reed, Release Time=100µs, Rise time=0s, RoHS=Yes, Switching Current=1A, Width=15.24mm
K3 K6: library part K01-0008-01-00002-6, "Reed Relay 5VDC 350Ohm 0.5A SPST-NO THT", Case/Package=SIP, Coil Current=14.28mA, Coil Voltage (DC)=5V, Contact Current Rating=500mA, Contact Resistence=0.2, Insulation Resistance=1T, Manufacturer=COTO, Max Operating Temperature=85°C, Min Operating Temperature=-20°C, Switching Voltage=200V, Coil resitence=350, Coil Type=Non-Latching, Contact Form=SPST, Contact Material=Ruthenium, Height=7.6mm, Manufacturer P/N=9002-05-00, Mounting Technology="Through Hole", Number of Terminal=6, Operate Time=350µs, Packaging=Bulk, Pins=6, Relay Type=RF, Release Time=100µs, Rise time=350µs, RoHS=Yes, Switching Current=500mA, Width=19.3mm
MH2 MH6 MH7 MH8: library part CMP-00028-00007-1, "hole 5mm pad drill 2.2", Case/Package=Pad, Max Operating Temperature=-40°C, Min Operating Temperature=125°C, Mounting Technology=Pad, Pins=1, RoHS Compliant=yes
Q1 Q2: library part CMP-013-00036-1, "MMBFJ202 Series 40 V 4.5 mA N-Channel General Purpose Amplifier - SOT-23", Case/Package=SOT-23, Manufacturer="Semi on", Max Operating Temperature=150°C, Min Operating Temperature=-55°C, Power=350mW, Manufacturer P/N=MMBFJ202, Mounting Technology=SMD, Pins=3, RoHS Compliant=yes, Transistor Type="Mosfet Channel N", Vgs (Max)=-40V, Vgs(th) (Max) @ Id=-
R1 R2 R3 R4: library part R01-0402-01-00105-2, "RES SMD 4.7K OHM 1% 1/16W 0402", Case/Package=0402, Manufacturer=Yageo, Max Operating Temperature=155°C, Min Operating Temperature=-55°C, Power Rating=62.5mW, Temperature Coefficient="100 ppm/ºC", Tolerance=1%, Voltage Rating=50V, Composition="Thick Film", Features="Automotive AEC-Q200, Moisture Resistant", Height=370µm, Length=990.6µm, Manufacturer P/N=AC0402FR-074K7L, Number of Terminations=2, Packaging="Tape & Reel", RoHS=Yes, Width=508µm
R5: library part R01-0402-01-00169-2, "RES SMD 10K OHM 1% 1/16W 0402", Case/Package=0402, Manufacturer=Yageo, Max Operating Temperature=155°C, Min Operating Temperature=-55°C, Power Rating=62.5mW, Temperature Coefficient="100 ppm/ºC", Tolerance=1%, Voltage Rating=50V, Composition="Thick Film", Features="Automotive AEC-Q200, Moisture Resistant", Height=370µm, Length=990.6µm, Manufacturer P/N=AC0402FR-0710KL, Number of Terminations=2, Packaging="Tape & Reel", RoHS=Yes, Width=508µm
R6 R7: library part R01-0402-01-00029-2, "RES SMD 1K OHM 1% 1/16W 0402", Case/Package=0402, Manufacturer=Yageo, Max Operating Temperature=155°C, Min Operating Temperature=-55°C, Power Rating=62.5mW, Temperature Coefficient="100 ppm/ºC", Tolerance=1%, Voltage Rating=50V, Composition="Thick Film", Features="Automotive AEC-Q200, Moisture Resistant", Height=370µm, Length=990.6µm, Manufacturer P/N=AC0402FR-071KL, Number of Terminations=2, Packaging="Tape & Reel", RoHS=Yes, Width=508µm
R8 R9 R10 R11 R36: library part R01-0402-01-00067-3, "RES SMD 2K OHM 1% 1/16W 0402", Case/Package=0402, Manufacturer=Yageo, Max Operating Temperature=155°C, Min Operating Temperature=-55°C, Power Rating=62.5mW, Temperature Coefficient="100 ppm/ºC", Tolerance=1%, Voltage Rating=50V, Composition="Thick Film", Features="Automotive AEC-Q200, Moisture Resistant", Height=370µm, Length=990.6µm, Manufacturer P/N=AC0402FR-072KL, Number of Terminations=2, Packaging="Tape & Reel", RoHS=Yes, Width=508µm
R12 R15 R16: library part R01-0402-01-00360-2, "RES SMD 100K OHM 1% 1/16W 0402", Case/Package=0402, Manufacturer=Yageo, Max Operating Temperature=155°C, Min Operating Temperature=-55°C, Power Rating=62.5mW, Temperature Coefficient="100 ppm/ºC", Tolerance=1%, Voltage Rating=50V, Composition="Thick Film", Features="Automotive AEC-Q200, Moisture Resistant", Height=370µm, Length=990.6µm, Manufacturer P/N=AC0402FR-07100KL, Number of Terminations=2, Packaging="Tape & Reel", RoHS=Yes, Width=508µm
R13: library part R01-0402-01-00337-2, "RES SMD 75K OHM 1% 1/16W 0402", Case/Package=0402, Manufacturer=Yageo, Max Operating Temperature=155°C, Min Operating Temperature=-55°C, Power Rating=62.5mW, Temperature Coefficient="100 ppm/ºC", Tolerance=1%, Voltage Rating=50V, Composition="Thick Film", Features="Automotive AEC-Q200, Moisture Resistant", Height=370µm, Length=990.6µm, Manufacturer P/N=AC0402FR-0775KL, Number of Terminations=2, Packaging="Tape & Reel", RoHS=Yes, Width=508µm
R14: library part R01-0402-01-00237-2, "RES SMD 25.5K OHM 1% 1/16W 0402", Case/Package=0402, Manufacturer=Yageo, Max Operating Temperature=155°C, Min Operating Temperature=-55°C, Power Rating=62.5mW, Temperature Coefficient="100 ppm/ºC", Tolerance=1%, Voltage Rating=50V, Composition="Thick Film", Features="Automotive AEC-Q200, Moisture Resistant", Height=370µm, Length=990.6µm, Manufacturer P/N=AC0402FR-0725K5L, Number of Terminations=2, Packaging="Tape & Reel", RoHS=Yes, Width=508µm
R17 R18 R19 R20 R21 R22 R23 R42 R43 R44: library part R01-0402-01-00437-2, "RES SMD 240 OHM 1% 1/16W 0402", Case/Package=0402, Manufacturer=Yageo, Max Operating Temperature=155°C, Min Operating Temperature=-55°C, Power Rating=62.5mW, Temperature Coefficient="100 ppm/ºC", Tolerance=1%, Voltage Rating=50V, Composition="Thick Film", Features="Automotive AEC-Q200, Moisture Resistant", Height=370µm, Length=990.6µm, Manufacturer P/N=AC0402FR-07240RL, Number of Terminations=2, Packaging="Tape & Reel", RoHS=Yes, Width=508µm
R24 R25 R27 R30 R31 R33 R35 R38: library part R01-0402-01-00475-2, "RES SMD 348K OHM 1% 1/16W 0402", Case/Package=0402, Manufacturer=Yageo, Max Operating Temperature=155°C, Min Operating Temperature=-55°C, Power Rating=62.5mW, Temperature Coefficient="100 ppm/ºC", Tolerance=1%, Voltage Rating=50V, Composition="Thick Film", Features="Automotive AEC-Q200, Moisture Resistant", Height=370µm, Length=990.6µm, Manufacturer P/N=AC0402FR-07348KL, Number of Terminations=2, Packaging="Tape & Reel", RoHS=Yes, Width=508µm
R26: library part R01-0402-01-00404-2, "RES SMD 165 OHM 1% 1/16W 0402", Case/Package=0402, Manufacturer=Yageo, Max Operating Temperature=155°C, Min Operating Temperature=-55°C, Power Rating=62.5mW, Temperature Coefficient="100 ppm/ºC", Tolerance=1%, Voltage Rating=50V, Composition="Thick Film", Features="Automotive AEC-Q200, Moisture Resistant", Height=370µm, Length=990.6µm, Manufacturer P/N=AC0402FR-07165RL, Number of Terminations=2, Packaging="Tape & Reel", RoHS=Yes, Width=508µm
R28: library part R01-0402-01-00008-7, "RES SMD 1.5K OHM 1% 1/16W 0402", Case/Package=0402, Manufacturer=Yageo, Max Operating Temperature=155°C, Min Operating Temperature=-55°C, Power Rating=62.5mW, Temperature Coefficient="100 ppm/ºC", Tolerance=1%, Voltage Rating=50V, Composition="Thick Film", Features="Automotive AEC-Q200, Moisture Resistant", Height=370µm, Length=990.6µm, Manufacturer P/N=AC0402FR-071K5L, Number of Terminations=2, Packaging="Tape & Reel", RoHS=Yes, Width=508µm
R29: library part R01-0402-01-00492-2, "RES SMD 412 OHM 1% 1/16W 0402", Case/Package=0402, Manufacturer=Yageo, Max Operating Temperature=155°C, Min Operating Temperature=-55°C, Power Rating=62.5mW, Temperature Coefficient="100 ppm/ºC", Tolerance=1%, Voltage Rating=50V, Composition="Thick Film", Features="Automotive AEC-Q200, Moisture Resistant", Height=370µm, Length=990.6µm, Manufacturer P/N=AC0402FR-07412RL, Number of Terminations=2, Packaging="Tape & Reel", RoHS=Yes, Width=508µm
R32: library part R01-0402-01-00517-2, "RES SMD 536K OHM 1% 1/16W 0402", Case/Package=0402, Manufacturer=Yageo, Max Operating Temperature=155°C, Min Operating Temperature=-55°C, Power Rating=62.5mW, Temperature Coefficient="100 ppm/ºC", Tolerance=1%, Voltage Rating=50V, Composition="Thick Film", Features="Automotive AEC-Q200, Moisture Resistant", Height=370µm, Length=990.6µm, Manufacturer P/N=AC0402FR-07536KL, Number of Terminations=2, Packaging="Tape & Reel", RoHS=Yes, Width=508µm
R34: library part R01-0402-01-00133-2, "RES SMD 6.2K OHM 1% 1/16W 0402", Case/Package=0402, Manufacturer=Yageo, Max Operating Temperature=155°C, Min Operating Temperature=-55°C, Power Rating=62.5mW, Temperature Coefficient="100 ppm/ºC", Tolerance=1%, Voltage Rating=50V, Composition="Thick Film", Features="Automotive AEC-Q200, Moisture Resistant", Height=370µm, Length=990.6µm, Manufacturer P/N=AC0402FR-076K2L, Number of Terminations=2, Packaging="Tape & Reel", RoHS=Yes, Width=508µm
R37: library part R01-0402-01-00345-2, "RES SMD 82K OHM 1% 1/16W 0402", Case/Package=0402, Manufacturer=Yageo, Max Operating Temperature=155°C, Min Operating Temperature=-55°C, Power Rating=62.5mW, Temperature Coefficient="100 ppm/ºC", Tolerance=1%, Voltage Rating=50V, Composition="Thick Film", Features="Automotive AEC-Q200, Moisture Resistant", Height=370µm, Length=990.6µm, Manufacturer P/N=AC0402FR-0782KL, Number of Terminations=2, Packaging="Tape & Reel", RoHS=Yes, Width=508µm
R39: library part R01-0402-01-00394-2, "RES SMD 150 OHM 1% 1/16W 0402", Case/Package=0402, Manufacturer=Yageo, Max Operating Temperature=155°C, Min Operating Temperature=-55°C, Power Rating=62.5mW, Temperature Coefficient="100 ppm/ºC", Tolerance=1%, Voltage Rating=50V, Composition="Thick Film", Features="Automotive AEC-Q200, Moisture Resistant", Height=370µm, Length=990.6µm, Manufacturer P/N=AC0402FR-07150RL, Number of Terminations=2, Packaging="Tape & Reel", RoHS=Yes, Width=508µm
R40: library part R01-0402-01-00027-2, "RES SMD 1.91K OHM 1% 1/16W 0402", Case/Package=0402, Manufacturer=Yageo, Max Operating Temperature=155°C, Min Operating Temperature=-55°C, Power Rating=62.5mW, Temperature Coefficient="100 ppm/ºC", Tolerance=1%, Voltage Rating=50V, Composition="Thick Film", Features="Automotive AEC-Q200, Moisture Resistant", Height=370µm, Length=990.6µm, Manufacturer P/N=AC0402FR-071K91L, Number of Terminations=2, Packaging="Tape & Reel", RoHS=Yes, Width=508µm
R41: library part R01-0603-01-00000-4, "RES SMD 0 OHM 1% 1/10W 0603", Case/Package=0603, Manufacturer=Yageo, Max Operating Temperature=155°C, Min Operating Temperature=-55°C, Power Rating=100mW, Temperature Coefficient="200 ppm/ºC", Tolerance=1%, Voltage Rating=50V, Voltage Rating1=75V, Composition="Thick Film", Features="Automotive AEC-Q200, Moisture Resistant", Height=550µm, Length=1.6002µm, Manufacturer P/N=AC0603FR-070RL, Number of Terminations=2, Packaging="Tape & Reel", RoHS=Yes, Width=800µm
U1: library part CMP-0005-0001-00001-1, "50-V, 7-ch darlington transistor array, -40 to 105C 16-TSSOP -40 to 105", Case/Package=TSSOP, Manufacturer="Texas Instruments", Max Operating Temperature=-40°C, Min Operating Temperature=105°C, Voltage Rating=50V, Height=1.2mm, Length=5mm, Manufacturer P/N=ULN2003AIPWR, Mounting Technology=SMD, Pins=16, RoHS Compliant=yes, Width=4.4mm
U2: library part CMP-0015-00000-5, "4-Channel Single ADC Delta-Sigma 860sps 16-bit Serial Automotive 10-Pin VSSOP", Case/Package=VSSOP10, Manufacturer="Texas Instrument", Max Operating Temperature=125°C, Min Operating Temperature=-40°C, Channels=4, Interface=I2C, Manufacturer P/N=ADS1115BQDGSRQ1, Mounting Technology=SMD, Pins=10, RoHS Compliant=yes
U3: library part U01-0007-01-00000-1, "AVR ATmega Microcontroller 8-bit 16MHz 256KB FLASH TQFP100", Case/Package=A, Frequency=16MHz, Manufacturer=Microchip, Max Operating Temperature=85°C, Max Supply Voltage=5.5V, Min Operating Temperature=-40°C, Minimum Supply Voltage=4.5V, Contact Plating=Tin, Core Architecture=AVR, Height=1.2mm, Interface="I2C, SPI, UART", Manufacturer P/N=ATMEGA2560-16AU, Max Frequency=16MHz, Memory Size=256KB, Memory Type=FLASH, Mounting Technology=SMD, Number of A/D="1 AD / 16 channels", Number of I/O=86, Number of Programmable I/O=86, Oscillator Type=External, Peripherals="Brown-out Detect/Reset, POR, PWM, WDT", Pins=100, RAM Size=8KB, RoHS=Yes, Watchdog Timer=Yes, Width=16.25mm
U4: library part CMP-0005-0002-00000-2, "Digital Potentiometer 5kOhm 256POS Volatile Linear Automotive 10-Pin MSOP", Case/Package=MSOP, Manufacturer=Microchip, Max Operating Temperature=125°C, Max Supply Voltage=5.5V, Min Operating Temperature=-40°C, Min Supply Voltage=1.8V, Resistance=5k, Temperature Coefficient="150 ppm/°C", Tolerance=20%, Height=950µm, Interface=SPI, Length=3mm, Manufacturer P/N=MCP4252-502E/UN, Memory Type=Volatile, Mount=SMD, Mounting Technology=SMD, Number of Elements=2, Number of Positions=256, Pins=10, RoHS Compliant=yes, Width=3mm
U5: library part CMP-019-00050-1, "V-Ref Precision 3.3V 20mA 8-Pin SOIC", Case/Package=SOIC, Manufacturer=Microchip, Max Operating Temperature=125°C, Max Supply Voltage=5.5V, Min Operating Temperature=-40°C, Min Supply Voltage=1.65V, Output Current="20 mA", Output Voltage=3.3V, Temperature Coefficient="50 ppm/°C", Tolerance="0.1 %", Manufacturer P/N=MCP1501-33E/SN, Mounting Technology=SMD, Pins=8, RoHS Compliant=yes
U6: library part CMP-019-00049-1, "V-Ref Precision 1.024V 20mA 8-Pin SOIC", Case/Package=SOIC, Manufacturer=Microchip, Max Operating Temperature=125°C, Max Supply Voltage=5.5V, Min Operating Temperature=-40°C, Min Supply Voltage=1.65V, Output Current="20 mA", Output Voltage=1.024kV, Temperature Coefficient="50 ppm/°C", Tolerance="0.1 %", Manufacturer P/N=MCP1501-10E/SN, Mounting Technology=SMD, Pins=8, RoHS Compliant=yes
U7: library part CMP-0005-0002-00001-2, "Digital Potentiometer 50kOhm 256POS Volatile Linear Automotive 10-Pin MSOP", Case/Package=MSOP, Manufacturer=Microchip, Max Operating Temperature=125°C, Max Supply Voltage=5.5V, Min Operating Temperature=-40°C, Min Supply Voltage=1.8V, Resistance=50k, Temperature Coefficient="150 ppm/°C", Tolerance=20%, Height=950µm, Interface=SPI, Length=3mm, Manufacturer P/N=MCP4252-503E/UN, Memory Type=Volatile, Mount=SMD, Mounting Technology=SMD, Number of Elements=2, Number of Positions=256, Pins=10, RoHS Compliant=yes, Width=3mm
U8: library part CMP-0005-0001-00000-1, "SRDA Series 15 V 8 pF SMT RailClamp® Low Capacitance TVS Diode Array - SOIC-8", Breakdown Voltage=3.2V, Capacitance=8pF, Case/Package=so-8, Clamping Voltage=15V, Leakage Current=1µV, Manufacturer=Semtech, Max Breakdown Voltage=6V, Max Operating Temperature=125°C, Max Power Dissipation=500W, Min Operating Temperature=-55°C, Peak Pulse Current=25A, Direction=Unidirectional, Height=1.75mm, Length=5mm, Manufacturer P/N=SRDA3.3-6.TBT, Mounting Technology=SMD, Number of Channels=6, Pins=8, RoHS Compliant=yes, Width=4mm
U9: library part CMP-014-00003-2, "Amp INSTR Amp Single ±18V 8-Pin MSOP", Case/Package=MSOP, Manufacturer=Analog, Max Operating Temperature=85°C, Max Supply Voltage=36V, Min Operating Temperature=-40°C, Min Supply Voltage=2.3V, Power=200mW, Channels=1, Manufacturer P/N=AD8221ARMZ-RL, Mounting Technology=SMD, Output Type=-, Pins=8, RoHS Compliant=yes
U10: library part CMP-014-00004-1, "Single JFET-input improved offset operational amplifier 8-SOIC 0 to 70", Case/Package=SOIC8, Manufacturer="Texas Instrument", Max Operating Temperature=70°C, Max Supply Voltage=30V, Min Operating Temperature=0°C, Min Supply Voltage=3.5V, Power=680mW, Channels=1, Manufacturer P/N=TL081ACD, Mounting Technology=SMD, Output Type=FET, Pins=8, RoHS Compliant=yes
U11 U12: library part CMP-014-00002-1, "Op Amp Dual GP R-R I/O 6V Automotive 8-Pin SOIC", Case/Package=SOIC, Manufacturer=Microchip, Max Operating Temperature=150°C, Max Supply Voltage=6V, Min Operating Temperature=-40°C, Min Supply Voltage=1.8V, Channels=2, Manufacturer P/N=MCP6402T-H/SN, Mounting Technology=SMD, Output Type=-, Pins=8, RoHS Compliant=yes
Y1: library part Y01-0001-01-00000-10, "16MHz ±10ppm 16pF 80Ω SMD-2520_4P", Case/Package=SMD-2520_4P, Frequency=16MHz, Load Capacitance=16pF, Max Operating Temperature=85°C, Min Operating Temperature=-40°C, ESR=80, Mounting Technology=SMD, Pins=4, RoHS Compliant=yes

## Via types
v1: diameter 17.72, hole 7.87, L1 to L4, 345 vias

## Nets (pads, with @x,y where several pads share a name; then routed paths per layer and width w, separated by ;. In a path a pad name is that pad's centre, name@x,y a point inside that pad or via, vN(x,y) a via of type N, cw(c..) or ccw(c..) an arc to the next point about the centre after c; other vN are vias at no path point)
3V3_REF: R6.2 R34.2 U5.7 U5.8 | length 664.6
  L1 w4: U5.8@3675.03,706.69 3685,696.71 U5.8@3685,690.24
  L1 w10: U5.8@3675.03,706.69 3668.55,706.69 3660,715.24 R6.2@3660,765 3660,795 3685,820 3840,820 3850,830 3850,1080 3835,1095 R34.2@3815,1095 ; U5.8@3685,690.24 U5.7@3735,690.24
1024V_REF: R7.2 U6.7 U6.8 U9.6 U11.5 | length 1717.2
  L1 w4: U9.6@3505,3582.01 3506.67,3580.34 3506.67,3543.33 3525,3525 3797.69,3525 3821.83,3500.86 3841.57,3500.86 3858,3484.43 3858,3391.69 3825.31,3359 3689,3359 3650,3320 3650,3305 3570,3225 3570,3125 3620,3075 U11.5@3620,2974.76 ; U6.8@3645,2560.24 U6.8@3645,2580.91
  L1 w10: U11.5@3620,2974.76 3616.53,2971.29 3591.29,2971.29 3550,2930 3550,2665 3580,2635 R7.2@3622.6,2635 3622.6,2603.31 U6.8@3645,2580.91 ; U6.8@3645,2560.24 U6.7@3695,2560.24
+3V3: C7.2 J1.100 K7.4 R1.2 R3.2 R4.2 U2.8 | length 8080.7
  L1 w4: J1.100@2451.54,3420.75 2451.54,3403.91 J1.100@2455.44,3400 ; v1(3105,3445) 3111.42,3438.58 ; C7.2@3140,3438.58 C7.2@3143.58,3435 ; R1.2@3350,3600 3350,3625 3350.84,3625.84 3350.84,3629.16 v1(3350,3630) ; R3.2@3368.7,3455 3400,3455 3410,3465 v1(3410,3465.86) ; R4.2@3368.7,3500 3397.66,3500 3403.92,3506.26 3405.89,3506.26 v1(3406.56,3506.93)
  L1 w10: J1.100@2455.44,3400 2475,3400 2495,3420 v1(2495,3438.86) ; 3111.42,3438.58 C7.2@3140,3438.58 ; C7.2@3143.58,3435 3220,3435 3230,3425 U2.8@3230,3383.46
  L3 w4: v1(3406.56,3506.93) v1@3408.28,3505.21 ; v1@3408.28,3467.58 v1(3410,3465.86)
  L3 w10: K7.4@130,675 130,780 195,845 1320,845 1370,895 2875,895 2925,845 3515,845 3615,945 3615,3345 3590,3370 3395.86,3370 3380,3385.86 3380,3420 3360,3440 ; v1(2495,3438.86) 2626.14,3438.86 2650,3415 2650,3375 2690,3335 2865,3335 2890,3360 2890,3410 2915,3435 3095,3435 v1(3105,3445) 3107.09,3445 3112.09,3440 3360,3440 ; v1(3350,3630) 3390,3630 3406.56,3613.44 v1(3406.56,3506.93) ; v1@3408.28,3467.58 v1@3408.28,3505.21 ; v1(3410,3465.86) 3408.52,3464.38 3408.52,3458.52 3390,3440 3360,3440